# Altium PCB PCB1.PcbDoc (part 2 of 2)
Units mm, origin at the board's own origin, x right, y up, seen from the top; angles counter-clockwise.
Board outline 210 x 140 mm, 2 copper layers (Top Layer, Bottom Layer); 228 components, 149 nets, 688 pads, 245 vias.
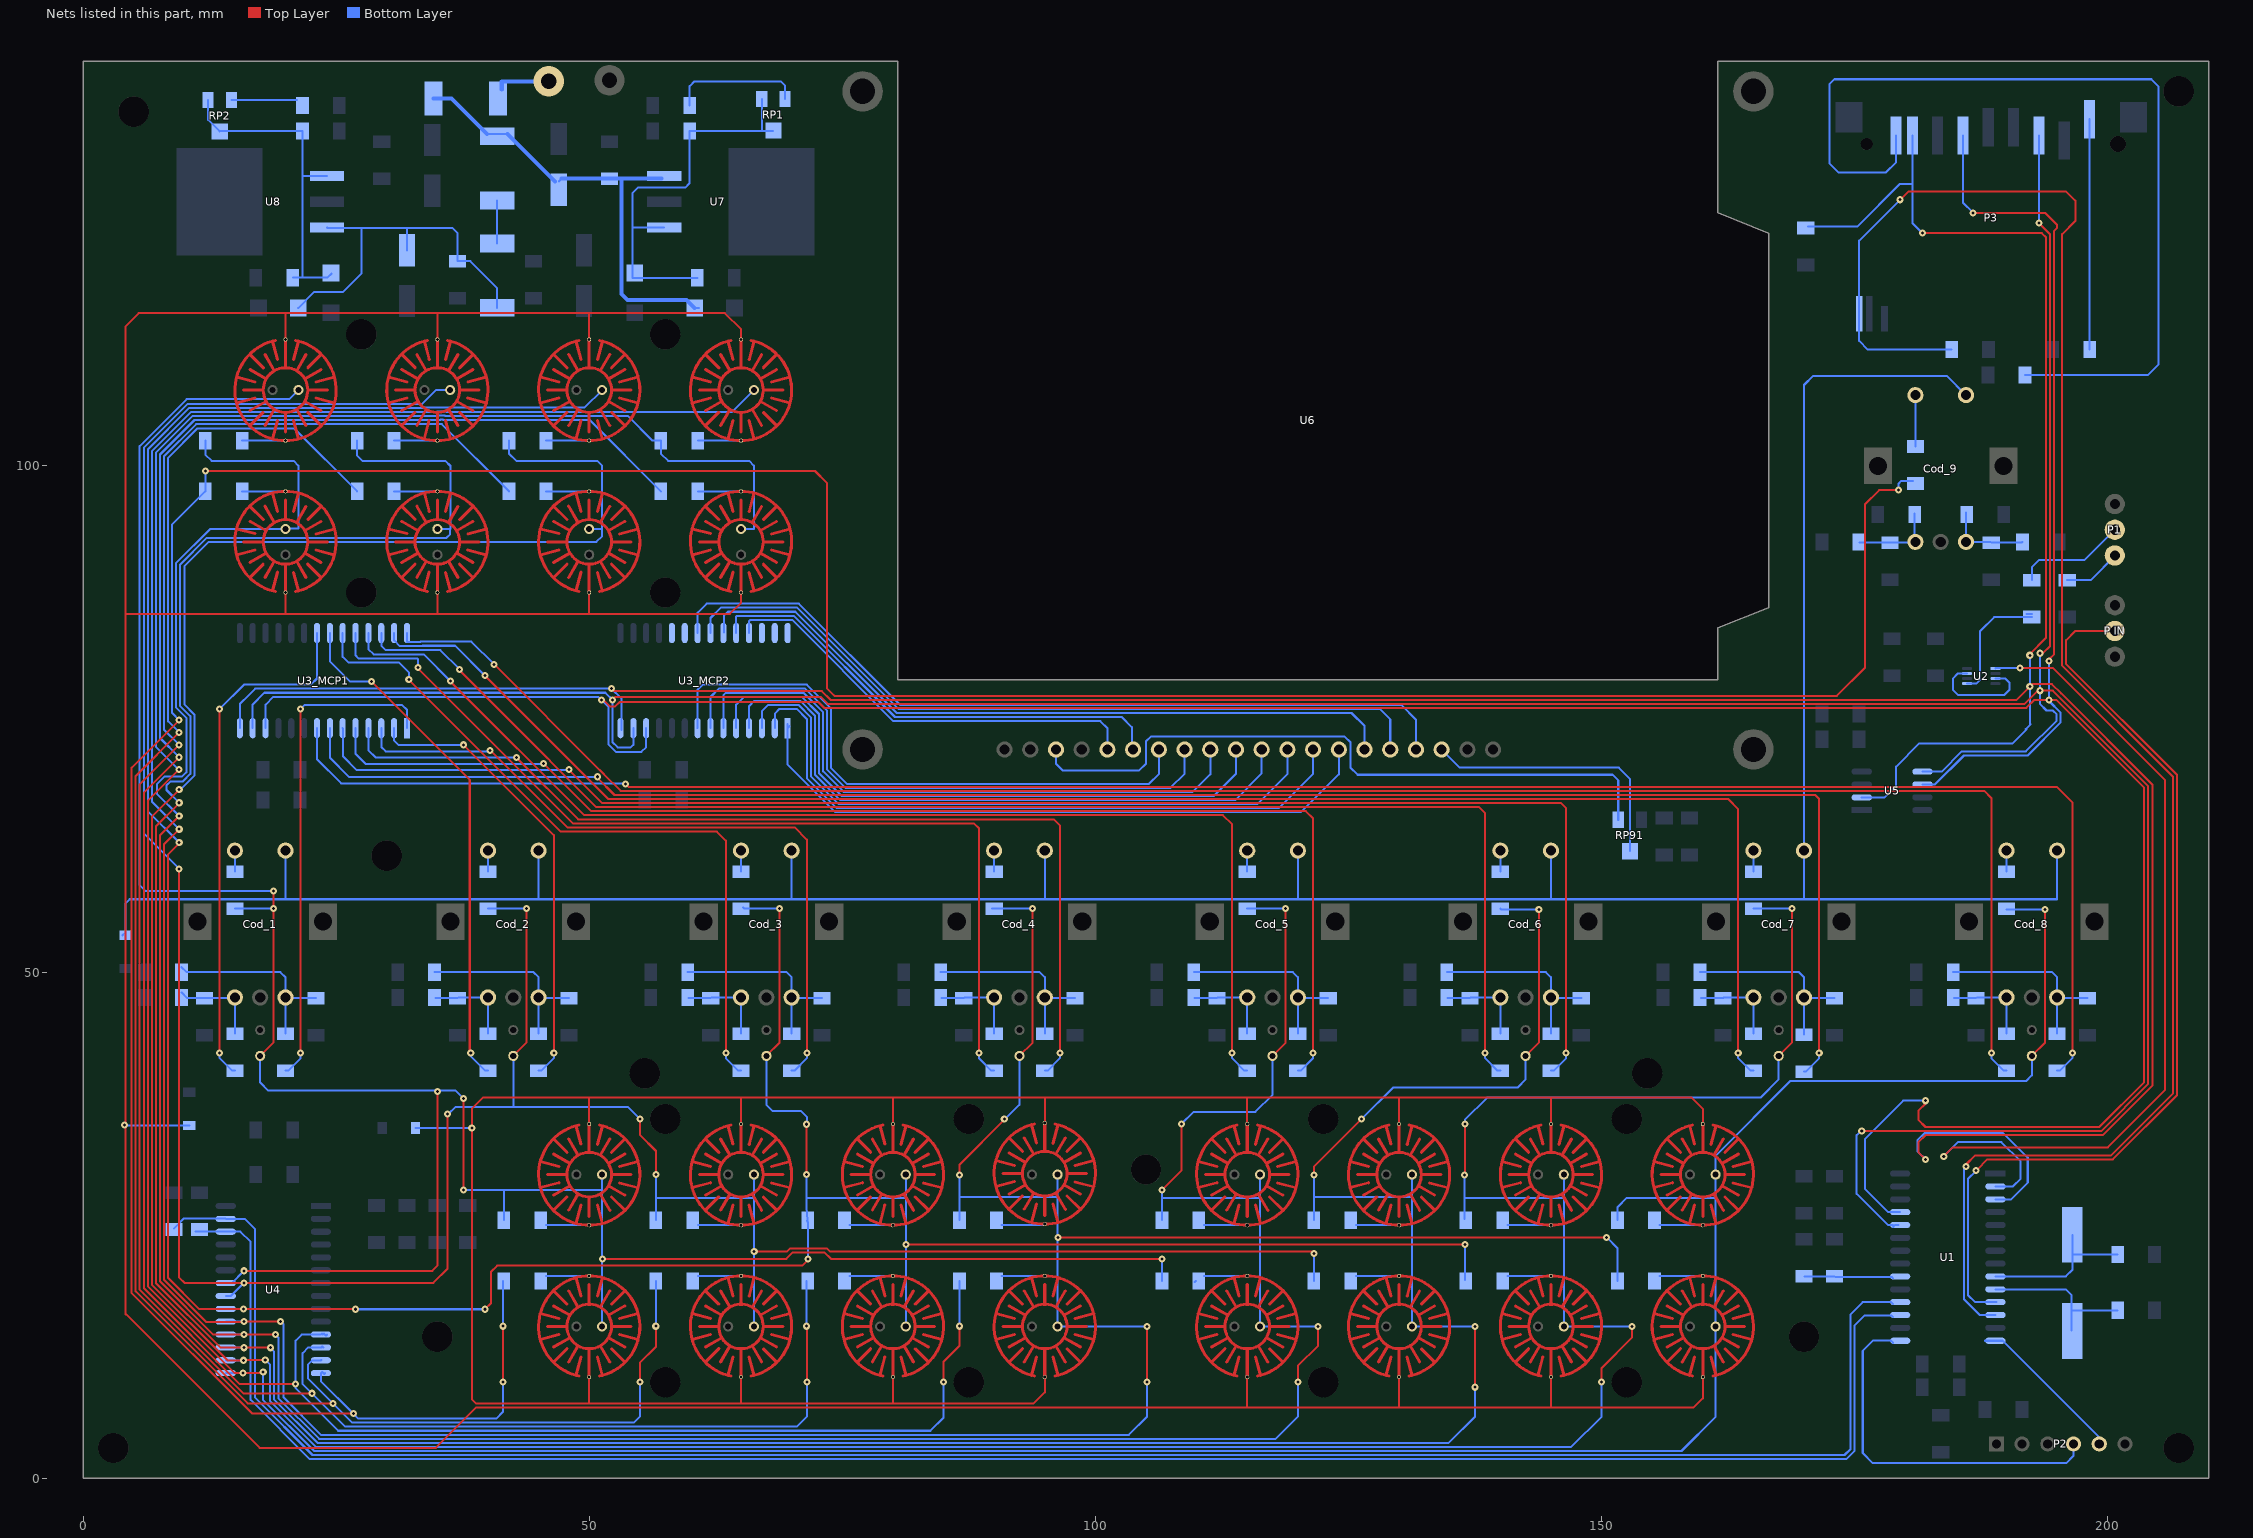
[diagram p2: the nets of this part, all layers, seen from the top]

## Via types
v1: diameter 0.7, hole 0.3, Top Layer to Bottom Layer, 245 vias

## Nets (pads, with @x,y where several pads share a name; then routed paths per layer and width w, separated by ;. In a path a pad name is that pad's centre, name@x,y a point inside that pad or via, vN(x,y) a via of type N, cw(c..) or ccw(c..) an arc to the next point about the centre after c; other vN are vias at no path point) (continued)
K1: D1_1.1 D1_2.1 D1_3.1 D1_4.1 R61.1 R501_1.1 R501_2.1 U4.22 | length 256.3
  Top Layer w0.2: v1(15.9,20.5) 34.5,20.5 35,21 v1(35,38.2) ; D1_4.1@17.5,41.73 18.8,43.03 v1(18.8,56.3) v1(18.8,58) ; v1(37.6,28.5) 37.5,28.6 37.6,28.7 v1(37.6,37.5) ; v1(51.3,21.675) 69.468,21.675 70.118,22.325 73.236,22.325 73.886,21.675 v1(106.575,21.675)
  Bottom Layer w0.2: U4.22@14.1,19.28 14.68,19.28 v1(15.9,20.5) ; R61.1@15,56.275 15.025,56.3 v1(18.8,56.3) ; D1_4.1@17.5,41.73 17.5,39.1 18.3,38.3 36.8,38.3 v1(37.6,37.5) ; v1(18.8,58) 6.2,58 5.6,58.6 5.6,101.96 10.24,106.6 20.37,106.6 D1_3.1@21.27,107.5 ; v1(37.6,28.5) 41.575,28.5 ; R501_1.1@41.575,25.5 41.575,28.5 ; D1_2.1@51.27,15 D1_1.1@51.27,30 ; 51.27,28.5 41.575,28.5 ; R501_2.1@106.575,19.5 v1(106.575,21.675)
K2: D2_1.1 D2_2.1 D2_3.1 D2_4.1 R62.1 R502_1.1 R502_2.1 U4.21 | length 299.4
  Top Layer w0.2: v1(9.5,60.2) 9.5,19.823 10.023,19.3 v1(15.9,19.3) 34.6,19.3 36,20.7 ; 36,20.7 v1(36,36) ; D2_4.1@42.5,41.73 43.8,43.03 v1(43.8,56.3) ; v1(55,35.5) 55,33.931 56.6,32.331 v1(56.6,30) ; v1(66.3,22.4) 69.514,22.4 69.839,22.725 73.477,22.725 73.802,22.4 121.4,22.4 v1(121.6,22.2)
  Bottom Layer w0.2: v1(9.5,60.2) 6,63.7 6,101.794 10.347,106.141 33.503,106.141 34.861,107.5 D2_3.1@36.27,107.5 ; U4.21@14.1,18.01 14.61,18.01 v1(15.9,19.3) ; v1(36,36) 36.1,36 36.8,36.7 53.8,36.7 v1(55,35.5) ; R62.1@40,56.275 40.025,56.3 v1(43.8,56.3) ; 42.5,36.7 D2_4.1@42.5,41.73 ; R502_1.1@56.575,25.5 56.575,26.775 56.6,26.8 ; v1(56.6,30) 56.6,26.8 ; D2_2.1@66.27,15 D2_1.1@66.27,30 ; 66.27,27.77 66.2,27.7 56.6,27.7 56.6,26.8 ; R502_2.1@121.575,19.5 121.6,19.525 v1(121.6,22.2)
K3: D3_1.1 D3_2.1 D3_3.1 D3_4.1 R63.1 R503_1.1 R503_2.1 U4.20 | length 326.8
  Top Layer w0.2: v1(9.502,62.813) 9.502,62.74 8.4,61.638 8.4,19.791 11.451,16.74 v1(15.86,16.74) v1@27.04,16.74 ; v1(39.7,16.7) 40.3,17.3 40.3,20.4 40.9,21 71.043,21 v1@71.6,21.557 ; D3_4.1@67.5,41.73 68.8,43.03 v1(68.8,56.3) ; v1(71.475,30) v1(71.475,34.975) ; v1(81.3,23.1) v1(136.5,23.1)
  Bottom Layer w0.2: v1@9.43,62.885 v1(9.502,62.813) 9.483,62.813 6.4,65.896 6.4,69.003 6.4,69.997 6.4,101.628 10.513,105.741 33.669,105.741 33.711,105.784 49.554,105.784 D3_3.1@51.27,107.5 ; U4.20@14.1,16.74 v1(15.86,16.74) ; v1(26.9,16.7) v1(39.7,16.7) ; R63.1@65.2,56.4 65.3,56.3 v1(68.8,56.3) ; D3_4.1@67.5,41.73 67.5,36.9 68.1,36.3 70.9,36.3 71.5,35.7 v1@71.5,35 ; v1(71.475,30) 71.475,26.775 R503_1.1@71.575,25.5 71.5,25.425 71.6,25.325 71.579,25.304 71.6,25.283 v1(71.6,21.675) ; 71.6,27.7 81.27,27.7 ; D3_2.1@81.27,15 D3_1.1@81.27,30 ; R503_2.1@136.5,19.575 v1(136.5,23.1)
K4: D4_1.1 D4_2.1 D4_3.1 D4_4.1 R64.1 R504_1.1 R504_2.1 U4.19 | length 395.2
  Top Layer w0.2: v1@9.499,64.119 8,62.62 8,19.626 12.185,15.44 15.84,15.44 v1(15.9,15.5) v1(19.5,15.5) ; v1(86.575,29.975) 86.575,30.975 91.1,35.5 v1(91,35.5) ; D4_4.1@92.5,41.73 93.8,43.03 v1(93.8,56.3) ; v1(96.3,23.8) v1(150.5,23.8) ; v1(105.1,9.5) v1(105.1,15)
  Bottom Layer w0.2: v1(9.502,64.119) 6.818,66.803 6.8,66.803 6.8,69.169 6.8,69.831 6.8,101.463 10.679,105.341 34.937,105.341 34.978,105.383 35.889,105.383 35.921,105.352 64.122,105.352 D4_3.1@66.27,107.5 ; U4.19@14.1,15.47 14.13,15.5 v1(15.9,15.5) ; v1(19.5,15.5) 19.8,15.2 19.8,7.994 23.494,4.3 103.3,4.3 105.1,6.1 v1(105.1,9.5) ; R504_1.1@86.575,25.5 86.575,27.8 ; v1(86.575,29.975) 86.575,27.8 ; R64.1@89.8,56.3 v1(93.8,56.3) ; v1(91,35.5) 91.1,35.5 92.5,36.9 D4_4.1@92.5,41.73 ; 96.27,27.8 86.575,27.8 ; D4_1.1@96.27,30 D4_2.1@96.27,15 v1(105.1,15) ; v1(150.5,23.8) 151.575,22.725 R504_2.1@151.575,19.5
K5: D5_1.1 D5_2.1 D5_3.1 D5_4.1 R65.1 R505_1.1 R505_2.1 U4.18 | length 314.3
  Top Layer w0.2: v1(9.502,65.425) 7.6,63.523 7.6,19.46 12.86,14.2 v1(15.9,14.2) v1(19,14.2) ; v1(106.6,28.5) 108.5,30.4 v1(108.5,35) ; D5_4.1@117.5,41.73 118.8,43.03 v1(118.8,56.3) ; v1(120,9.5) 120,11.1 122,13.1 v1(122,15)
  Bottom Layer w0.2: v1(9.502,65.425) 7.3,67.628 7.3,68.554 8.085,69.339 9.792,69.339 10.2,69.747 10.2,75.119 9.2,76.119 9.2,90.431 12.539,93.77 D5_3.1@20,93.77 ; R505_2.1@12.075,102.5 12.075,101.125 12.7,100.5 20.8,100.5 21.27,100.03 21.27,93.83 D5_3.1@20.06,93.83 ; U4.18@14.1,14.2 v1(15.9,14.2) ; v1(19,14.2) 19.3,13.9 19.3,7.928 23.328,3.9 101.666,3.9 117.8,3.9 120,6.1 v1(120,9.5) ; R505_1.1@106.575,25.5 106.6,25.525 v1(106.6,28.5) ; 106.6,27.7 116.27,27.7 ; v1(108.5,35) 109.7,36.2 115.8,36.2 117.5,37.9 D5_4.1@117.5,41.73 ; R65.1@115,56.275 115.025,56.3 v1(118.8,56.3) ; D5_1.1@116.27,30 D5_2.1@116.27,15 v1(122,15)
K6: D6_1.1 D6_2.1 D6_3.1 D6_4.1 R66.1 R506_1.1 R506_2.1 U4.17 | length 354.8
  Top Layer w0.2: v1(9.502,66.731) 9.502,66.686 7.2,64.384 7.2,19.294 13.594,12.9 v1(15.9,12.9) v1(18.5,12.9) ; v1(121.575,29.975) 121.575,30.775 v1(126.3,35.5) ; v1(137.5,9) v1(137.5,15) ; D6_4.1@142.5,41.73 143.8,43.03 v1(143.8,56.2)
  Bottom Layer w0.2: v1(9.502,66.731) 8.243,67.99 8.243,68.443 8.655,68.855 9.874,68.855 10.6,69.581 10.6,75.285 9.6,76.285 9.6,90.266 12.234,92.9 35.9,92.9 36.27,93.27 36.27,93.77 ; U4.17@14.1,12.93 v1@15.87,12.93 ; v1(18.5,12.9) 18.85,12.55 18.85,7.813 23.163,3.5 103.112,3.5 134.9,3.5 137.5,6.1 v1(137.5,9) ; R506_2.1@27.075,102.5 27.075,101.025 27.6,100.5 35.8,100.5 36.3,100 36.3,93.8 36.27,93.77 ; D6_3.1@35,93.77 36.27,93.77 ; R506_1.1@121.575,25.5 121.575,27.8 ; v1(121.575,29.975) 121.575,27.8 ; v1(126.3,35.5) 129.4,38.6 141.7,38.6 142.5,39.4 D6_4.1@142.5,41.73 ; 131.27,27.8 121.575,27.8 ; D6_1.1@131.27,30 D6_2.1@131.27,15 v1(137.5,15) ; R66.1@140,56.275 140.075,56.2 v1(143.8,56.2)
K7: D7_1.1 D7_2.1 D7_3.1 D7_4.1 R67.1 R507_1.1 R507_2.1 U4.16 | length 395.2
  Top Layer w0.2: v1(9.502,68.038) 6.8,65.335 6.8,19.128 14.268,11.66 v1(15.84,11.66) 15.9,11.6 16,11.7 v1(18,11.7) ; v1@136.5,30 v1(136.5,35) ; v1(150,9.5) 150,10.9 153,13.9 v1(153,15) ; D7_4.1@167.5,41.73 168.8,43.03 v1(168.8,56.3)
  Bottom Layer w0.2: v1(9.502,68.038) 9.622,68.038 11,69.415 11,75.451 10,76.451 10,90.1 12.4,92.5 50.7,92.5 51.27,93.07 51.27,100.03 50.8,100.5 42.8,100.5 42.075,101.225 R507_2.1@42.075,102.5 ; U4.16@14.1,11.66 v1(15.84,11.66) ; v1(18,11.7) 18.45,11.25 18.45,7.647 22.997,3.1 102.946,3.1 147,3.1 150,6.1 v1(150,9.5) ; D7_3.1@50,93.77 51.21,93.77 ; R507_1.1@136.475,25.6 136.475,27.7 ; v1(136.475,29.975) 136.475,27.7 ; v1(136.5,35) 136.5,35.4 138.7,37.6 165.7,37.6 167.5,39.4 D7_4.1@167.5,41.73 ; 146.27,27.7 136.475,27.7 ; D7_1.1@146.27,30 D7_2.1@146.27,15 v1(153,15) ; R67.1@165,56.275 165.025,56.3 v1(168.8,56.3)
K8: D8_1.1 D8_2.1 D8_3.1 D8_4.1 R68.1 R508_1.1 R508_2.1 U4.15 | length 414.1
  Top Layer w0.2: v1(9.462,70.006) 6.4,66.943 6.4,66.235 6.4,18.963 14.973,10.39 v1(15.79,10.39) v1@17.49,10.39 ; D8_4.1@192.5,41.73 193.8,43.03 v1(193.8,56.2)
  Bottom Layer w0.2: v1(9.462,70.006) 7.2,72.268 7.2,101.297 10.844,104.941 35.102,104.941 35.144,104.983 35.724,104.983 35.755,104.952 53.8,104.952 56.251,102.5 R508_2.1@57.075,102.5 57.075,101.225 57.8,100.5 65.8,100.5 66.27,100.03 66.27,93.8 66.24,93.77 D8_3.1@65,93.77 ; U4.15@14.1,10.39 v1(15.79,10.39) ; v1(17.8,10.5) 17.8,7.731 22.831,2.7 102.781,2.7 157.9,2.7 161.27,6.07 D8_2.1@161.27,15 D8_1.1@161.27,30 ; R508_1.1@151.575,25.5 151.575,26.775 152.5,27.7 161.17,27.7 161.27,27.8 ; D8_1.1@161.4,30.13 D8_1.1@161.27,30 ; R68.1@190.025,56.2 v1(193.8,56.2) ; D8_4.1@192.5,41.73 192.5,39.8 191.95,39.25 168.65,39.25 161.27,31.87 D8_1.1@161.27,30
K9: R69.1 R509_1.1 R509_2.1 U4.14 | length 354.2
  Top Layer w0.2: v1(9.5,74.9) 4.8,70.2 4.8,18.3 16.7,6.4 v1(26.7,6.4) ; v1(12.1,99.5) 72.3,99.5 73.471,98.329 73.471,78.059 74.215,77.315 ; v1(41.475,15.025) 41.5,14.95 v1(41.5,9.5) ; 74.215,77.3 173.249,77.3 176.026,80.077 176.026,96.226 177.419,97.619 v1(179.33,97.619)
  Bottom Layer w0.2: v1(9.5,74.9) 8.8,75.6 8.8,94.225 R509_2.1@12.075,97.5 12.1,97.525 v1(12.1,99.5) ; U4.14@23.91,10.4 23.81,10.3 23.61,10.5 U4.14@23.5,10.39 23.5,9.6 v1(26.7,6.4) 27.2,5.9 40.8,5.9 41.5,6.6 v1(41.5,9.5) ; R509_1.1@41.475,19.5 v1(41.475,15.025) v1@41.6,15 ; v1(179.33,97.619) 179.33,98.256 179.572,98.498 R69.1@180.777,98.498
K10: R510_1.1 R510_2.1 U4.13 | length 182.9
  Top Layer w0.2: v1(9.5,73.676) 5.2,69.376 5.2,18.466 16.266,7.4 v1(24.7,7.4) ; v1(55,9.5) 55,11.4 56.575,12.975 v1(56.575,15.025)
  Bottom Layer w0.2: v1(9.5,73.676) 8.4,74.776 8.4,100.8 11.3,103.7 20.875,103.7 R510_2.1@27.075,97.5 ; U4.13@23.54,11.7 U4.13@23.5,11.66 22.66,11.66 22.2,11.2 22.2,9.9 26.6,5.5 54.4,5.5 55,6.1 v1(55,9.5) ; v1(56.575,15.025) R510_1.1@56.575,19.5
K11: R511_1.1 R511_2.1 U4.12 | length 214.7
  Top Layer w0.2: v1(9.5,72.453) 5.6,68.553 5.6,18.631 15.831,8.4 v1(22.6,8.4) ; v1(71.475,15.025) 71.5,14.95 v1(71.5,9.5)
  Bottom Layer w0.2: v1(9.5,72.453) 8,73.953 8,100.966 11.176,104.141 35.434,104.141 R511_2.1@42.075,97.5 ; U4.12@23.73,12.9 23.63,13 23.53,12.9 U4.12@23.5,12.93 22.264,12.93 21.7,12.366 21.7,9.3 25.9,5.1 70.5,5.1 71.5,6.1 v1(71.5,9.5) ; v1(71.475,15.025) R511_1.1@71.475,19.5
K12: R512_1.1 R512_2.1 U4.11 | length 246.1
  Top Layer w0.2: v1(9.5,71.229) 6,67.729 6,18.797 15.497,9.3 v1(21,9.3) ; v1(85,9.5) 85,11.5 86.575,13.075 v1(86.575,15.025)
  Bottom Layer w0.2: v1(9.5,71.229) 7.6,73.129 7.6,101.131 11.01,104.541 35.268,104.541 35.309,104.583 35.558,104.583 35.599,104.541 50.034,104.541 R512_2.1@57.075,97.5 ; U4.11@24.1,14.2 24,14.1 23.8,14.3 23.7,14.2 23.6,14.3 U4.11@23.5,14.2 21.6,14.2 21,13.6 21,8.9 25.2,4.7 83.7,4.7 85,6 v1(85,9.5) ; v1(86.575,15.025) R512_1.1@86.575,19.5
MISO: P3.7 R44.1 U1.3 U3_MCP1.14 U3_MCP2.14 U5.2 | length 383.9
  Top Layer w0.2: v1(52.2,78) 52.45,77.75 72.986,77.75 73.836,76.9 191,76.9 v1(192.3,78.2) 192.55,78.45 194.484,78.45 195.4,77.534 204.4,68.534 204.4,38.794 199.506,33.9 182,33.9 181.3,33.2 181.3,32.2 v1(182,31.5) ; v1(181.7,123) 193.5,123 193.9,122.6 193.9,83.019 192.3,81.419 v1(192.3,81.3) v1@192.3,81.5
  Bottom Layer w0.2: U3_MCP1.14@15.49,74.1 15.49,76.49 16.4,77.4 17,78 18.41,78 19.49,78 v1(52.2,78) 53.2,77 U3_MCP2.14@53.2,73.9 ; R44.1@170.373,123.635 175.25,123.635 179.479,127.864 180.558,127.864 ; U5.2@175.7,67.27 177.97,67.27 179.1,68.4 179.1,70.3 181.4,72.6 190.6,72.6 191.95,73.95 ; P3.7@180.7,132.65 180.7,124 v1(181.7,123) ; v1@181.9,31.5 v1(182,31.5) 181.2,32.3 181.2,33.4 181.9,34.1 189.666,34.1 192.1,31.666 192.1,29.2 190.46,27.56 U1.3@188.9,27.56 ; 191.9,74 192.381,74.482 192.3,74.562 v1(192.3,78.2) v1(192.3,81.3)
MOSI: P3.2 U1.24 U3_MCP1.13 U3_MCP2.13 U5.5 | length 350.2
  Top Layer w0.2: v1(52.3,76.9) 52.585,77.185 72.867,77.185 73.551,76.5 191.8,76.5 193.1,77.8 194.569,77.8 194.959,77.41 204,68.369 204,38.96 199.34,34.3 178.649,34.3 v1(175.7,34.3) ; v1(193.2,124) 194.3,122.9 194.3,82.2 193.6,81.5 v1(193.3,81.5)
  Bottom Layer w0.2: U3_MCP1.13@16.76,74.1 16.76,76.44 17.92,77.6 18.576,77.6 19.324,77.6 51.6,77.6 v1(52.3,76.9) 52.3,72.7 52.8,72.2 54.1,72.2 54.36,72.46 U3_MCP2.13@54.36,74.1 ; v1(175.7,34.3) 175.6,34.3 175.2,33.9 175.2,28.1 178.3,25 U1.24@178.8,25 ; U1.24@178.8,24.82 178.98,25 U1.24@179.351,25 ; U5.5@181.7,69.81 183.61,69.81 185.6,71.8 191.919,71.8 194.95,74.831 194.95,75.466 194.569,75.847 193.953,75.847 193.3,76.5 v1(193.3,77.8) ; v1(193.2,124) P3.2@193.2,132.65 ; v1(193.3,81.5) 193.3,78 v1@193.4,77.9
NetC1_1: C1.1 C2.2 D1.2 D2.2 D4.1 U7.3 | length 45.2
  Bottom Layer w0.2: D4.1@39.92,132.78 D4.1@41.92,132.78 ; C1.1@47,128.1 C1.1@47.275,128.375 ; D2.2@60.4,115.6 D2.2@60.84,115.6
  Bottom Layer w0.4: D1.2@34.62,136.3 36.4,136.3 D4.1@39.92,132.78 ; D4.1@41.92,132.78 C1.1@46.6,128.1 ; C1.1@47.275,128.375 C2.2@52,128.375 53.2,128.375 ; U7.3@57.135,128.375 53.2,128.375 ; D2.2@60.4,115.6 59.6,116.4 53.8,116.4 53.2,117 53.2,128.375
NetC3_2: C3.2 D3.1 R2.2 RP1.1 RP1.3 U7.1 | length 40.4
  Bottom Layer w0.2: 54.3,123.56 U7.1@57.4,123.56 ; C3.2@59.9,133.075 59.9,127.9 59.5,127.5 54.8,127.5 54.26,126.96 54.26,118.56 R2.2@60.675,118.56 ; C3.2@59.925,133.1 RP1.3@68.15,133.1 ; 67.05,133.15 RP1.1@67.05,136.25
NetC6_1: C6.1 C7.2 D5.2 D6.2 U8.3 | length 37.2
  Bottom Layer w0.2: D6.2@21.26,115.6 22.86,117.2 25.7,117.2 27.5,119 27.5,123.5 ; U8.3@24.1,123.56 24.16,123.5 27.5,123.5 ; C6.1@32,121.3 32,123.5 ; D5.2@40.9,115.62 40.9,117.574 38.249,120.225 C7.2@37,120.225 37,123 36.5,123.5 27.5,123.5
NetC8_2: C8.2 D7.1 R4.2 RP2.1 RP2.3 U8.1 | length 32.7
  Bottom Layer w0.2: RP2.1@12.35,136.15 12.35,134.2 RP2.3@13.5,133.05 13.55,133.1 C8.2@21.675,133.1 21.675,118.625 ; R4.2@20.725,118.6 24.14,118.6 D7.1@24.55,119.01 ; 21.675,128.7 21.735,128.64 U8.1@24.1,128.64
NetC71_1_2: C71_1.2 Cod_1.A R71_1.1 R73_1.1 | length 9.1
  Bottom Layer w0.2: R71_1.1@9.725,48 10.3,47.425 C71_1.2@12,47.425 14.925,47.425 Cod_1.A@15,47.5 R73_1.1@15,43.925
NetC71_2_2: C71_2.2 Cod_2.A R71_2.1 R73_2.1 | length 8.7
  Bottom Layer w0.2: R71_2.1@34.8,47.425 C71_2.2@37,47.425 ; C71_2.2@37.075,47.5 Cod_2.A@40,47.5 R73_2.1@40,43.925
NetC71_3_2: C71_3.2 Cod_3.A R71_3.1 R73_3.1 | length 8.7
  Bottom Layer w0.2: R71_3.1@59.8,47.425 C71_3.2@62,47.425 ; C71_3.2@62.075,47.5 Cod_3.A@65,47.5 R73_3.1@65,43.925
NetC71_4_2: C71_4.2 Cod_4.A R71_4.1 R73_4.1 | length 8.7
  Bottom Layer w0.2: R71_4.1@84.8,47.425 C71_4.2@87,47.425 ; C71_4.2@87.075,47.5 Cod_4.A@90,47.5 R73_4.1@90,43.925
NetC71_5_2: C71_5.2 Cod_5.A R71_5.1 R73_5.1 | length 8.7
  Bottom Layer w0.2: R71_5.1@109.8,47.425 C71_5.2@112,47.425 ; C71_5.2@112.075,47.5 Cod_5.A@115,47.5 R73_5.1@115,43.925
NetC71_6_2: C71_6.2 Cod_6.A R71_6.1 R73_6.1 | length 8.7
  Bottom Layer w0.2: R71_6.1@134.8,47.425 C71_6.2@137,47.425 ; C71_6.2@137.075,47.5 Cod_6.A@140,47.5 R73_6.1@140,43.925
NetC71_7_2: C71_7.2 Cod_7.A R71_7.1 R73_7.1 | length 8.8
  Bottom Layer w0.2: R71_7.1@159.8,47.425 C71_7.2@162,47.425 162.075,47.5 Cod_7.A@165,47.5 R73_7.1@165,43.925
NetC71_8_2: C71_8.2 Cod_8.A R71_8.1 R73_8.1 | length 8.7
  Bottom Layer w0.2: R71_8.1@184.8,47.425 C71_8.2@187,47.425 ; C71_8.2@187.075,47.5 Cod_8.A@190,47.5 R73_8.1@190,43.925
NetC71_9_2: C71_9.2 Cod_9.A R71_9.1 R73_9.1 | length 8.3
  Bottom Layer w0.2: R71_9.1@175.5,92.425 C71_9.2@178.5,92.425 Cod_9.A@180.925,92.425 ; Cod_9.A@180.925,92.375 R73_9.1@180.925,95.3
NetC72_1_1: C72_1.1 Cod_1.B R72_1.1 R74_1.1 | length 19.3
  Bottom Layer w0.2: R72_1.1@9.725,50.5 10.225,50 19.5,50 20,49.5 Cod_1.B@20,47.5 ; R74_1.1@20,43.925 Cod_1.B@20,47.5 ; C72_1.1@23,47.425 20.075,47.425 Cod_1.B@20,47.5
NetC72_2_1: C72_2.1 Cod_2.B R72_2.1 R74_2.1 | length 19.1
  Bottom Layer w0.2: R72_2.1@34.725,50 44.5,50 45,49.5 Cod_2.B@45,47.5 ; R74_2.1@45,43.925 Cod_2.B@45,47.5 ; C72_2.1@48,47.425 45.075,47.425 Cod_2.B@45,47.5
NetC72_3_1: C72_3.1 Cod_3.B R72_3.1 R74_3.1 | length 19
  Bottom Layer w0.2: R72_3.1@59.725,50 69.5,50 70,49.5 Cod_3.B@70,47.5 R74_3.1@70,43.925 ; Cod_3.B@70.075,47.425 C72_3.1@73,47.425
NetC72_4_1: C72_4.1 Cod_4.B R72_4.1 R74_4.1 | length 19
  Bottom Layer w0.2: R72_4.1@84.725,50 94.5,50 95,49.5 Cod_4.B@95,47.5 R74_4.1@95,43.925 ; Cod_4.B@95.075,47.425 C72_4.1@98,47.425
NetC72_5_1: C72_5.1 Cod_5.B R72_5.1 R74_5.1 | length 19
  Bottom Layer w0.2: R72_5.1@109.725,50 119.5,50 120,49.5 Cod_5.B@120,47.5 R74_5.1@120,43.925 ; Cod_5.B@120.075,47.425 C72_5.1@123,47.425
NetC72_6_1: C72_6.1 Cod_6.B R72_6.1 R74_6.1 | length 19
  Bottom Layer w0.2: R72_6.1@134.725,50 144.5,50 145,49.5 Cod_6.B@145,47.5 R74_6.1@145,43.925 ; Cod_6.B@145.075,47.425 C72_6.1@148,47.425
NetC72_7_1: C72_7.1 Cod_7.B R72_7.1 R74_7.1 | length 19.1
  Bottom Layer w0.2: R72_7.1@159.725,50 169.5,50 170,49.5 Cod_7.B@170,47.5 R74_7.1@170,43.825 ; Cod_7.B@170.075,47.425 C72_7.1@173,47.425
NetC72_8_1: C72_8.1 Cod_8.B R72_8.1 R74_8.1 | length 19.1
  Bottom Layer w0.2: R72_8.1@184.725,50 194.5,50 195,49.5 Cod_8.B@195,47.5 ; R74_8.1@195,43.925 Cod_8.B@195,47.5 ; C72_8.1@198,47.425 195.075,47.425 Cod_8.B@195,47.5
NetC72_9_1: C72_9.1 Cod_9.B R72_9.1 R74_9.1 | length 8.5
  Bottom Layer w0.2: R74_9.1@186,95.425 Cod_9.B@186,92.5 C72_9.1@188.425,92.5 ; C72_9.1@188.5,92.425 191.5,92.425 R72_9.1@191.575,92.5
NetC107_1: C107.1 C108.1 U1.20 | length 8.7
  Bottom Layer w0.2: C107.1@170.05,19.95 C108.1@173,19.95 ; C108.1@173.1,19.875 178.665,19.875 U1.20@178.8,19.74
NetCod_1_1: Cod_1.1 R61.2 | length 2.1
  Bottom Layer w0.2: R61.2@15,59.925 Cod_1.1@15,62
NetCod_1_2: Cod_1.2 Cod_2.2 Cod_3.2 Cod_4.2 Cod_5.2 Cod_6.2 Cod_7.2 Cod_8.2 Cod_9.2 D61.2 | length 295.8
  Bottom Layer w0.2: D61.2@3.9,53.635 4.2,53.935 4.2,56.8 4.6,57.2 70,57.2 ; 20,57.2 Cod_1.2@20,62 ; 45,57.2 Cod_2.2@45,62 ; Cod_3.2@70,62 70,57.2 ; 95,57.2 Cod_4.2@95,62 ; Cod_5.2@120,62 120,57.2 ; Cod_6.2@145,62 145,57.2 ; Cod_9.2@186,107 184.1,108.9 170.9,108.9 170,108 170,57.2 ; Cod_8.2@195,62 195,57.2 170,57.2 ; 70,57.2 120,57.2 ; 120,57.2 145,57.2 ; 145,57.2 170,57.2
NetCod_2_1: Cod_2.1 R62.2 | length 2.1
  Bottom Layer w0.2: R62.2@40,59.925 Cod_2.1@40,62
NetCod_3_1: Cod_3.1 R63.2 | length 2.1
  Bottom Layer w0.2: R63.2@65,59.925 Cod_3.1@65,62
NetCod_4_1: Cod_4.1 R64.2 | length 2.1
  Bottom Layer w0.2: R64.2@90,59.925 Cod_4.1@90,62
NetCod_5_1: Cod_5.1 R65.2 | length 2.1
  Bottom Layer w0.2: R65.2@115,59.925 Cod_5.1@115,62
NetCod_6_1: Cod_6.1 R66.2 | length 2.1
  Bottom Layer w0.2: R66.2@140,59.925 Cod_6.1@140,62
NetCod_7_1: Cod_7.1 R67.2 | length 2.1
  Bottom Layer w0.2: R67.2@165,59.925 Cod_7.1@165,62
NetCod_8_1: Cod_8.1 R68.2 | length 2.1
  Bottom Layer w0.2: R68.2@190,59.925 Cod_8.1@190,62
NetCod_9_1: Cod_9.1 R69.2 | length 5.1
  Bottom Layer w0.2: R69.2@181,101.925 Cod_9.1@181,107
NetD1_1: D1.1 P0.1 | length 5.4
  Bottom Layer w0.4: D1.1@41.36,137.2 41.36,137.96 41.4,138 P0.1@46,138
NetD4_2: D4.2 D5.1 | length 4.2
  Bottom Layer w0.2: D5.1@40.9,121.98 D4.2@40.9,126.22
NetD51_1_2: D51_1.2 S1_1.1 S2_1.1 S3_1.1 S4_1.1 S5_1.1 S6_1.1 S7_1.1 S8_1.1 S9_1.1 S10_1.1 S11_1.1 S12_1.1 | length 243
  Top Layer w0.2: S9_1.1@50,10 50,9.2 50,7.4 ; S1_1.1@50,35 50,37.6 ; 65,7.4 S10_1.1@65,10 ; S2_1.1@65,35 65,37.6 ; 80,7.4 S11_1.1@80,10 ; S3_1.1@80,35 80,37.6 ; S12_1.1@95,10 95,8.5 93.9,7.4 50,7.4 ; S4_1.1@95,35 95,37.6 ; S5_1.1@115,35 115,37.6 ; S6_1.1@130,35 130,37.6 ; S7_1.1@145,35 145,37.6 ; S8_1.1@160,35 160,36.5 158.9,37.6 130,37.6 ; 50,7.4 38.8,7.4 38.4,7.8 38.4,36.5 39.5,37.6 50,37.6 ; 50,37.6 80,37.6 ; 80,37.6 95,37.6 ; 95,37.6 130,37.6
  Bottom Layer w0.2: D51_1.2@32.835,34.6 v1(38.4,34.6)
NetD51_2_2: D51_2.2 S1_2.1 S2_2.1 S3_2.1 S4_2.1 S5_2.1 S6_2.1 S7_2.1 S8_2.1 S9_2.1 S10_2.1 S11_2.1 S12_2.1 | length 418
  Top Layer w0.2: 20,85.4 S9_2.1@20,87.5 ; S5_2.1@20,112.5 20,115.1 ; 35,85.4 S10_2.1@35,87.5 ; S6_2.1@35,112.5 35,115.1 ; 38.8,7 130,7 ; 38.812,6.988 34.842,3.018 17.436,3.018 4.254,16.2 4.2,16.2 4.2,85.4 ; 50,85.4 S11_2.1@50,87.5 ; S7_2.1@50,112.5 50,115.1 ; S12_2.1@65,87.5 65,86.5 63.9,85.4 4.2,85.4 ; S8_2.1@65,112.5 65,113.5 63.4,115.1 35,115.1 ; 115,7.1 S1_2.1@115,10 ; S2_2.1@130,10 130,7 ; S3_2.1@145,10 145,7 ; S4_2.1@160,10 160,7.9 159.1,7 145,7 ; 4.2,85.4 4.2,113.8 5.5,115.1 20,115.1 ; 20,115.1 35,115.1 ; 130,7 145,7
  Bottom Layer w0.2: v1(4.1,34.9) 3.97,34.9 3.935,34.865 D51_2.2@10.5,34.865
NetP1_1: P1.1 R102.1 | length 5.9
  Bottom Layer w0.2: R102.1@196,88.725 198.325,88.725 200.76,91.16 P1.1@200.9,91.16
NetP1_2: P1.2 R101.1 | length 11.2
  Bottom Layer w0.2: R101.1@192.5,88.725 192.5,90 193.2,90.7 197.7,90.7 P1.2@200.7,93.7 P1.2@200.9,93.7
NetP3_8: P3.8 R43.1 | length 91.9
  Bottom Layer w0.2: P3.8@179.1,132.65 179.1,130 178.1,129 173.4,129 172.5,129.9 172.5,137.7 173,138.2 204.3,138.2 205,137.5 205,110 204,109 R43.1@191.825,109
NetP3_9: P3.9 R42.1 | length 22.7
  Bottom Layer w0.2: R42.1@198.2,111.525 P3.9@198.2,134.25
"NetP IN_2": "P IN.2" U1.11 | length 93.5
  Top Layer w0.2: v1(187,30.4) 187.2,30.4 187.1,30.5 188.1,31.5 200.5,31.5 206.841,37.841 206.841,69.493 195.9,80.434 195.9,82.8 196.8,83.7 200.7,83.7
  Bottom Layer w0.2: v1(187,30.4) 186.2,29.6 186.2,18.1 186.9,17.4 U1.11@189,17.4
NetR1_2: R1.2 RP1.2 | length 13
  Bottom Layer w0.2: R1.2@59.925,135.6 59.925,137.525 60.4,138 68.9,138 69.35,137.55 RP1.2@69.35,136.25
NetR3_1: R3.1 RP2.2 | length 6.5
  Bottom Layer w0.2: RP2.2@14.65,136.15 R3.1@21.125,136.15
NetR73_1_2: R73_1.2 U3_MCP1.21 | length 51.9
  Top Layer w0.2: v1(13.5,42) v1@13.5,76
  Bottom Layer w0.2: v1(13.5,42) 13.5,41.5 14.725,40.275 R73_1.2@15,40.275 ; v1(13.5,76) 15.9,78.4 18.244,78.4 19.297,78.4 19.656,78.4 22.5,78.4 23.11,79.01 U3_MCP1.21@23.11,83.5
NetR73_2_2: R73_2.2 U3_MCP1.22 | length 51.1
  Top Layer w0.2: v1(28.5,78.7) 38.2,69 38.2,42.1 v1(38.3,42)
  Bottom Layer w0.2: U3_MCP1.22@24.38,83.5 24.38,80.72 26.4,78.7 v1(28.5,78.7) ; v1(38.3,42) 38.3,41.7 39.725,40.275 R73_2.2@40,40.275
NetR73_3_2: R73_3.2 U3_MCP1.23 | length 71.6
  Top Layer w0.2: v1(32.178,78.9) 47.198,63.88 62.599,63.88 63.5,62.979 v1(63.5,42)
  Bottom Layer w0.2: U3_MCP1.23@25.65,83.5 25.65,81.15 26.2,80.6 31.2,80.6 32.178,79.622 v1(32.178,78.9) ; v1(63.5,42) 63.5,41.5 64.725,40.275 R73_3.2@65,40.275
NetR73_4_2: R73_4.2 U3_MCP1.24 | length 96.1
  Top Layer w0.2: v1(33.1,80.1) 33.1,79.981 48.381,64.7 88,64.7 88.5,64.2 v1(88.5,42)
  Bottom Layer w0.2: U3_MCP1.24@26.92,83.5 26.92,81.28 27.2,81 33,81 33.1,80.9 v1(33.1,80.1) ; v1(88.5,42) 88.5,41.5 89.725,40.275 R73_4.2@90,40.275
NetR73_5_2: R73_5.2 U3_MCP1.25 | length 119.2
  Top Layer w0.2: v1@36.4,78.6 49.5,65.5 112.6,65.5 113.5,64.6 v1(113.5,42)
  Bottom Layer w0.2: U3_MCP1.25@28.19,83.5 28.19,81.91 28.7,81.4 32.651,81.4 33.65,81.4 v1(36.3,78.75) v1@36.3,78.9 ; v1(113.5,42) 113.5,41.5 114.725,40.275 R73_5.2@115,40.275
NetR73_6_2: R73_6.2 U3_MCP1.26 | length 143.4
  Top Layer w0.2: v1(37.2,79.9) 37.2,79.8 45.75,71.25 45.769,71.25 46.15,70.869 46.15,70.85 50.7,66.3 137.467,66.3 137.9,66.3 138.5,65.7 v1(138.5,42)
  Bottom Layer w0.2: U3_MCP1.26@29.46,83.5 29.46,82.24 29.9,81.8 32.486,81.8 35.3,81.8 v1(37.2,79.9) ; v1(138.5,42) 138.5,41.5 139.725,40.275 R73_6.2@140,40.275
NetR73_7_2: R73_7.2 U3_MCP1.27 | length 167
  Top Layer w0.2: v1(39.7,79.3) 51.9,67.1 137.135,67.1 162.5,67.1 163.5,66.1 v1(163.5,42)
  Bottom Layer w0.2: U3_MCP1.27@30.73,83.5 30.73,82.77 31.3,82.2 33.469,82.2 33.51,82.241 36.759,82.241 v1(39.7,79.3) ; v1(163.5,42) 163.5,41.5 164.725,40.275 R73_7.2@165,40.275
NetR73_8_2: R73_8.2 U3_MCP1.28 | length 191.5
  Top Layer w0.2: v1(40.6,80.4) 51.05,69.95 51.069,69.95 51.45,69.569 51.45,69.55 53.1,67.9 136.804,67.9 187.8,67.9 188.5,67.2 v1(188.5,42)
  Bottom Layer w0.2: U3_MCP1.28@32,83.5 32,82.6 33.303,82.6 33.344,82.641 38.359,82.641 v1(40.6,80.4) ; v1(188.5,42) 188.5,41.5 189.725,40.275 R73_8.2@190,40.275
NetR74_1_2: R74_1.2 U3_MCP1.1 | length 49.2
  Top Layer w0.2: v1(21.5,42) v1(21.5,76)
  Bottom Layer w0.2: R74_1.2@20,40.275 20.275,40.275 21.5,41.5 v1(21.5,42) ; v1(21.5,76) 21.9,76.4 31.5,76.4 32,75.9 U3_MCP1.1@32,74.1
NetR74_2_2: R74_2.2 U3_MCP1.2 | length 44.9
  Top Layer w0.2: v1(37.564,72.459) 46.5,63.524 v1(46.5,42)
  Bottom Layer w0.2: U3_MCP1.2@30.73,74.1 30.73,72.87 31.147,72.453 31.153,72.459 v1(37.564,72.459) ; R74_2.2@45.025,40.3 R74_2.2@45,40.275 45.275,40.275 46.5,41.5 v1(46.5,42)
NetR74_3_2: R74_3.2 U3_MCP1.3 | length 71.4
  Top Layer w0.2: v1(40.181,71.907) 40.239,71.907 47.846,64.3 70.284,64.3 71.5,63.084 v1(71.5,42)
  Bottom Layer w0.2: U3_MCP1.3@29.46,74.1 29.46,72.24 29.9,71.8 40.074,71.8 v1(40.181,71.907) ; R74_3.2@70,40.275 70.275,40.275 71.5,41.5 v1(71.5,42)
NetR74_4_2: R74_4.2 U3_MCP1.4 | length 98.6
  Top Layer w0.2: v1(42.8,71.2) 48.9,65.1 95.9,65.1 96.5,64.5 v1(96.5,42)
  Bottom Layer w0.2: U3_MCP1.4@28.19,74.1 28.19,71.907 28.897,71.2 v1(42.8,71.2) ; R74_4.2@95,40.275 95.275,40.275 96.5,41.5 v1(96.5,42)
NetR74_5_2: R74_5.2 U3_MCP1.5 | length 125.5
  Top Layer w0.2: v1(45.5,70.6) 50.2,65.9 120.8,65.9 121.5,65.2 v1(121.5,42)
  Bottom Layer w0.2: U3_MCP1.5@26.92,74.1 26.9,74.08 26.9,71.6 27.95,70.55 45.45,70.55 v1(45.5,70.6) ; R74_5.2@120,40.275 120.275,40.275 121.5,41.5 v1(121.5,42)
NetR74_6_2: R74_6.2 U3_MCP1.6 | length 152.5
  Top Layer w0.2: v1(48,70) 51.3,66.7 137.301,66.7 146,66.7 146.5,66.2 v1(146.5,42)
  Bottom Layer w0.2: U3_MCP1.6@25.65,74.1 25.7,74.05 25.7,71.3 27.05,69.95 47.95,69.95 v1(48,70) ; R74_6.2@145,40.275 145.275,40.275 146.5,41.5 v1(146.5,42)
NetR74_7_2: R74_7.2 U3_MCP1.7 | length 179.4
  Top Layer w0.2: v1(50.8,69.3) 50.8,69.2 52.5,67.5 136.97,67.5 146.831,67.5 ; 146.9,67.5 171.1,67.5 171.5,67.1 v1(171.5,42)
  Bottom Layer w0.2: U3_MCP1.7@24.38,74.1 24.4,74.08 24.4,71.15 26.25,69.3 v1(50.8,69.3) ; R74_7.2@170,40.175 170.175,40.175 171.5,41.5 v1(171.5,42)
NetR74_8_2: R74_8.2 U3_MCP1.8 | length 205.5
  Top Layer w0.2: v1(53.6,68.6) 53.9,68.3 64.523,68.3 136.638,68.3 194.969,68.3 196.5,66.769 v1(196.5,42)
  Bottom Layer w0.2: U3_MCP1.8@23.11,74.1 23.11,71.033 25.493,68.65 53.55,68.65 v1(53.6,68.6) ; R74_8.2@195,40.275 195.275,40.275 196.5,41.5 v1(196.5,42)
NetR101_2: R101.2 U2.5 | length 12.4
  Bottom Layer w0.2: U2.5@186.1,78.5 187,78.5 187.4,78.9 187.4,83.7 188.775,85.075 R101.2@192.5,85.075 ; R101.2@192,85.4 R101.2@192.5,85.4
NetR501_1_2: R501_1.2 S1_1.2 | length 4.3
  Bottom Layer w0.2: R501_1.2@45.725,25 S1_1.2@50,25
NetR501_2_2: R501_2.2 S1_2.2 | length 4.5
  Bottom Layer w0.2: R501_2.2@109.8,19.375 R501_2.2@109.925,19.5 ; R501_2.2@110.725,20 S1_2.2@115,20
NetR502_1_2: R502_1.2 S2_1.2 | length 4.3
  Bottom Layer w0.2: R502_1.2@60.725,25 S2_1.2@65,25
NetR502_2_2: R502_2.2 S2_2.2 | length 4.3
  Bottom Layer w0.2: R502_2.2@125.725,20 S2_2.2@130,20
NetR503_1_2: R503_1.2 S3_1.2 | length 4.3
  Bottom Layer w0.2: R503_1.2@75.725,25 S3_1.2@80,25
NetR503_2_2: R503_2.2 S3_2.2 | length 4.4
  Bottom Layer w0.2: R503_2.2@140.725,20 S3_2.2@145.1,20
NetR504_1_2: R504_1.2 S4_1.2 | length 4.3
  Bottom Layer w0.2: R504_1.2@90.725,25 S4_1.2@95,25
NetR504_2_2: R504_2.2 S4_2.2 | length 4.3
  Bottom Layer w0.2: R504_2.2@155.725,20 S4_2.2@160,20
NetR505_1_2: R505_1.2 S5_1.2 | length 4.3
  Bottom Layer w0.2: R505_1.2@110.725,25 S5_1.2@115,25
NetR505_2_2: R505_2.2 S5_2.2 | length 4.3
  Bottom Layer w0.2: R505_2.2@15.725,102.5 S5_2.2@20,102.5
NetR506_1_2: R506_1.2 S6_1.2 | length 4.3
  Bottom Layer w0.2: R506_1.2@125.725,25 S6_1.2@130,25
NetR506_2_2: R506_2.2 S6_2.2 | length 4.3
  Bottom Layer w0.2: R506_2.2@30.725,102.5 S6_2.2@35,102.5
NetR507_1_2: R507_1.2 S7_1.2 | length 4.3
  Bottom Layer w0.2: R507_1.2@140.725,25 S7_1.2@145,25
NetR507_2_2: R507_2.2 S7_2.2 | length 4.3
  Bottom Layer w0.2: R507_2.2@45.725,102.5 S7_2.2@50,102.5
NetR508_1_2: R508_1.2 S8_1.2 | length 4.3
  Bottom Layer w0.2: R508_1.2@155.725,25 S8_1.2@160,25
NetR508_2_2: R508_2.2 S8_2.2 | length 4.3
  Bottom Layer w0.2: R508_2.2@60.725,102.5 S8_2.2@65,102.5
NetR509_1_2: R509_1.2 S9_1.2 | length 4.3
  Bottom Layer w0.2: R509_1.2@45.725,20 S9_1.2@50,20
NetR509_2_2: R509_2.2 S9_2.2 | length 4.3
  Bottom Layer w0.2: R509_2.2@15.725,97.5 S9_2.2@20,97.5
NetR510_1_2: R510_1.2 S10_1.2 | length 4.3
  Bottom Layer w0.2: R510_1.2@60.725,20 S10_1.2@65,20
NetR510_2_2: R510_2.2 S10_2.2 | length 4.3
  Bottom Layer w0.2: R510_2.2@30.725,97.5 S10_2.2@35,97.5
NetR511_1_2: R511_1.2 S11_1.2 | length 4.3
  Bottom Layer w0.2: R511_1.2@75.725,20 S11_1.2@80,20
NetR511_2_2: R511_2.2 S11_2.2 | length 4.3
  Bottom Layer w0.2: R511_2.2@45.725,97.5 S11_2.2@50,97.5
NetR512_1_2: R512_1.2 S12_1.2 | length 4.3
  Bottom Layer w0.2: R512_1.2@90.725,20 S12_1.2@95,20
NetR512_2_2: R512_2.2 S12_2.2 | length 4.3
  Bottom Layer w0.2: R512_2.2@60.725,97.5 S12_2.2@65,97.5
NetRP91_1: RP91.1 U6.18 | length 67.1
  Bottom Layer w0.2: U6.18@96.108,71.988 96.108,70.592 96.8,69.9 104.3,69.9 105,70.6 105,72.8 105.5,73.3 124.6,73.3 125.2,72.7 125.2,70.2 125.9,69.5 151.1,69.5 151.65,68.95 RP91.1@151.65,65.05
NetRP91_3: RP91.3 U6.3 | length 26.9
  Bottom Layer w0.2: U6.3@134.208,71.988 135.996,70.2 151.7,70.2 152.8,69.1 RP91.3@152.8,61.95
NetU2_3: U2.3 U2.7 | length 11
  Bottom Layer w0.2: U2.7@186.1,79.5 185.2,79.5 184.7,79 184.7,77.9 185.2,77.4 189.8,77.4 190.3,77.9 190.3,78.6 189.9,79 U2.3@188.9,79
NetU3_MCP2_1: U3_MCP2.1 U6.7 | length 64.7
  Bottom Layer w0.2: U3_MCP2.1@69.6,74.1 U3_MCP2.1@69.8,74.3 ; U3_MCP2.1@69.6,74.5 69.6,70.5 74.3,65.8 120.3,65.8 124.048,69.548 U6.7@124.048,71.988
NetU3_MCP2_2: U3_MCP2.2 U6.8 | length 66.1
  Bottom Layer w0.2: U3_MCP2.2@68.33,74.1 68.33,75.53 68.8,76 70.506,76 71.5,75.006 71.5,69.166 74.466,66.2 118.1,66.2 121.508,69.608 U6.8@121.508,71.988
NetU3_MCP2_3: U3_MCP2.3 U6.9 | length 65
  Bottom Layer w0.2: U3_MCP2.3@67.06,74.1 67.06,75.76 67.7,76.4 70.672,76.4 71.9,75.172 71.9,69.331 74.631,66.6 116,66.6 118.968,69.568 U6.9@118.968,71.988
NetU3_MCP2_4: U3_MCP2.4 U6.10 | length 64
  Bottom Layer w0.2: U3_MCP2.4@65.79,74.1 65.79,76.29 66.3,76.8 70.837,76.8 72.3,75.337 72.3,69.497 74.797,67 113.8,67 116.4,69.6 116.4,71.96 U6.10@116.428,71.988
NetU3_MCP2_5: U3_MCP2.5 U6.11 | length 62.8
  Bottom Layer w0.2: U3_MCP2.5@64.52,74.1 64.52,76.42 65.3,77.2 71.003,77.2 72.7,75.503 72.7,69.663 74.963,67.4 111.7,67.4 113.888,69.588 U6.11@113.888,71.988
NetU3_MCP2_6: U3_MCP2.6 U6.12 | length 62.1
  Bottom Layer w0.2: U3_MCP2.6@63.25,74.1 63.25,77.35 63.5,77.6 71.169,77.6 73.1,75.669 73.1,69.828 75.128,67.8 109.6,67.8 111.348,69.548 U6.12@111.348,71.988
NetU3_MCP2_7: U3_MCP2.7 U6.13 | length 60.7
  Bottom Layer w0.2: U3_MCP2.7@61.98,74.1 61.98,77.18 62.8,78 71.334,78 73.5,75.834 73.5,69.994 75.294,68.2 107.416,68.2 108.808,69.592 U6.13@108.808,71.988
NetU3_MCP2_8: U3_MCP2.8 U6.14 | length 59.9
  Bottom Layer w0.2: U3_MCP2.8@60.71,74.1 60.7,74.11 60.7,77.9 61.2,78.4 71.5,78.4 73.9,76 73.9,70.16 75.46,68.6 105.3,68.6 106.268,69.568 U6.14@106.268,71.988
NetU3_MCP2_19: U3_MCP2.19
NetU3_MCP2_20: U3_MCP2.20
NetU3_MCP2_21: U3_MCP2.21 U6.4 | length 81
  Bottom Layer w0.2: U3_MCP2.21@60.71,83.5 60.71,85.51 61.6,86.4 70.7,86.4 80.7,76.4 130.2,76.4 131.668,74.932 U6.4@131.668,71.988
NetU3_MCP2_22: U3_MCP2.22 U6.5 | length 76.6
  Bottom Layer w0.2: U3_MCP2.22@61.98,83.5 61.98,84.98 63,86 70.534,86 80.534,76 128.1,76 129.128,74.972 U6.5@129.128,71.988
NetU3_MCP2_23: U3_MCP2.23 U6.6 | length 72.1
  Bottom Layer w0.2: U3_MCP2.23@63.3,83.55 63.3,85.2 63.7,85.6 70.369,85.6 80.369,75.6 125.3,75.6 126.588,74.312 U6.6@126.588,71.988
NetU3_MCP2_24: U3_MCP2.24 U6.15 | length 47.5
  Bottom Layer w0.2: U3_MCP2.24@64.5,83.52 64.5,85.1 64.6,85.2 70.203,85.2 80.203,75.2 102.6,75.2 103.6,74.2 103.6,72.116 U6.15@103.728,71.988
NetU3_MCP2_25: U3_MCP2.25 U6.16 | length 42.6
  Bottom Layer w0.2: U3_MCP2.25@65.79,83.5 65.79,84.69 65.9,84.8 66.812,84.8 70.037,84.8 80.037,74.8 100.5,74.8 101.2,74.1 U6.16@101.2,72.576
NetU3_MCP2_26: U3_MCP2.26
NetU3_MCP2_27: U3_MCP2.27
NetU3_MCP2_28: U3_MCP2.28
"PGEC DEBUG": P2.4 U1.15 | length 36.3
  Bottom Layer w0.2: U1.15@178.8,13.39 178.59,13.6 176.8,13.6 175.8,12.6 175.8,2.5 176.8,1.5 195.9,1.5 196.62,2.22 P2.4@196.62,3.4
"PGED DEBUG": P2.5 U1.14 | length 15.9
  Bottom Layer w0.2: U1.14@187.9,13.59 189.61,13.59 199.16,4.04 P2.5@199.16,3.4
SCK: P3.5 U1.25 U3_MCP1.12 U3_MCP2.12 U5.6 | length 359.5
  Top Layer w0.2: v1(51.2,76.9) 51.381,76.9 52.031,76.25 52.569,76.25 53.006,76.687 72.607,76.687 73.194,76.1 191.966,76.1 192.766,76.9 v1(194.2,76.9) 194.9,76.9 203.6,68.2 203.6,39.126 199.175,34.7 182,34.7 181.3,35.4 181.3,36.3 182,37 v1(182,37.3) ; v1(186.7,125) 193.8,125 195,123.8 195,123.531 194.7,123.231 194.7,81.4 194.2,80.9 v1(194.2,80.75)
  Bottom Layer w0.2: U3_MCP1.12@18.03,74.1 18.03,76.43 18.8,77.2 19.1,77.2 50.9,77.2 51.9,76.2 51.9,72.5 52.641,71.759 55.159,71.759 55.63,72.23 U3_MCP2.12@55.63,74.1 ; U1.25@179.5,26.29 178.31,26.29 176,28.6 176,33.5 179.8,37.3 v1(182,37.3) ; U5.6@181.7,68.54 182.94,68.54 185.8,71.4 192.085,71.4 195.35,74.665 195.35,75.632 194.2,76.782 v1(194.2,76.9) ; P3.5@185.7,132.65 185.7,126 v1(186.7,125) ; v1(194.2,80.75) v1(194.2,76.9) ; v1@194.35,76.9 v1(194.2,76.9)
SCL: R32.1 U1.17 U4.26 | length 199.5
  Bottom Layer w0.2: R32.1@11.1,24.375 U4.26@14.285,24.375 ; U4.26@14.1,24.36 15.54,24.36 16.55,23.35 16.55,7.75 22.4,1.9 174.166,1.9 175,2.734 175,15.1 176,16.1 178.63,16.1 U1.17@178.8,15.93
"SD SWITCH": P3.S2 R41.1 U1.12 | length 176.8
  Top Layer w0.2: v1(179.5,126.3) 180.3,127.1 195.9,127.1 196.8,126.2 196.8,124.2 195.5,122.9 195.5,80.269 206.441,69.327 206.441,38.007 200.334,31.9 186.9,31.9 v1@186,31
  Bottom Layer w0.2: v1(179.5,126.3) 175.45,122.25 P3.S2@175.45,115.05 175.45,112.35 176.3,111.5 R41.1@184.575,111.5 ; v1@186,31 185.8,30.8 185.8,17.7 187.37,16.13 U1.12@188.9,16.13
  other v1: 186,30.8
SDA: R31.2 U1.18 U4.27 | length 203.7
  Bottom Layer w0.2: R31.2@9,24.7 9.975,25.675 U4.27@14.055,25.675 ; U4.27@14.1,25.63 15.97,25.63 17,24.6 17,7.966 22.666,2.3 102.615,2.3 174,2.3 174.6,2.9 174.6,16.2 175.8,17.4 178.6,17.4 U1.18@178.8,17.2
"TX MIDI": U1.2 U2.1 | length 89.5
  Top Layer w0.2: v1@184,32 184.7,32.7 200.003,32.7 205.641,38.339 205.641,68.996 194.588,80.05 v1(191.35,80.05)
  Bottom Layer w0.2: v1@184,32 185.2,33.2 189.5,33.2 191.4,31.3 191.4,29.6 190.63,28.83 U1.2@188.9,28.83 ; U2.1@188.9,80 188.95,80.05 v1(191.35,80.05)
  other v1: 183.8,31.8
X1: C105.1 U1.9 Y1.2 | length 15.7
  Bottom Layer w0.2: U1.9@188.9,19.94 195.86,19.94 196.5,20.58 Y1.2@196.5,24.05 ; Y1.2@196.6,22.1 C105.1@200.975,22.1
X2: C106.1 U1.10 Y1.1 | length 15.8
  Bottom Layer w0.2: U1.10@188.9,18.67 195.87,18.67 196.44,18.1 Y1.1@196.44,14.61 ; Y1.1@196.44,16.6 C106.1@200.975,16.6
pads on no net: Cod_1. Cod_2. Cod_3. Cod_4. Cod_5. Cod_6. Cod_7. Cod_8. Cod_9. P2.6 P3.S1 P3.x U2.2 U2.6 U4.2 U4.23 U4.24 U4.25 U6.
copper on no net: | length 204.6
  Top Layer w0.2: 169.4,6.8 169.4,9.3 177.3,17.2 180.9,17.2 172.9,9.2 180.9,9.2 180.9,3.8 177.4,3.8 177.4,6.8 169.4,6.8 ; 182.4,6.3 182.4,9.2 184.75,11.55 186.4,13.2 186.4,17.2 182.4,13.2 182.4,17.2 190.4,17.2 190.4,13.2 188.5,11.3 186.4,9.2 186.4,6.3 190.4,10.3 190.4,7.302 190.4,6.3 182.4,6.3 ; 192,5.5 192.55,5.5 192.675,5.625 192.675,6.85 193.05,6.85 193.525,7.325 193.525,5.625 193.65,5.5 194.2,5.5 194.2,7.5 194.2,8 194.2,8.975 193.85,9.325 193.675,9.5 193.5,9.5 193.5,8.3 192.7,7.5 192.7,9.5 192,9.5 192,5.5 ; 194.6,5.5 195.3,6.2 195.3,7 196.8,5.5 196.8,6.3 196.75,6.35 196.65,6.45 196.192,7.26 195.9,7.26 195.9,7.3 196.8,8.2 196.8,9 196.3,9.5 194.8,9.5 194.6,9.3 194.6,5.5 ; 195.3,8 195.3,9 195.8,9 196.1,8.7 196.1,8.3 195.8,8 195.3,8 ; 197.2,5.8 197.2,6.5 197.2,8.5 197.2,9.5 197.475,9.5 197.638,9.338 197.8,9.5 198.3,9.5 198.5,9.3 199.4,8.4 199.4,8 199.4,6.4 198.5,5.5 197.5,5.5 197.2,5.8 ; 197.9,6.3 197.9,8.3 198.25,8.65 198.8,8.1 198.8,7 198.1,6.3 197.9,6.3 ; 199.8,6.4 200.7,5.5 201.2,6 201.7,5.5 202,5.9 202,8.6 201.65,8.95 201.5,8.8 201.5,7.3 201.243,6.957 200.8,7.4 200.8,6.4 200.35,6.85 200.35,9.2 200.175,9.375 199.8,9 199.8,6.4 ; 202.4,5.5 202.4,9.3 202.6,9.5 204.1,9.5 204.6,9 204.6,8.2 203.7,7.3 203.7,7.26 203.992,7.26 204.45,6.45 204.55,6.35 204.6,6.3 204.6,5.5 203.1,7 203.1,6.2 202.4,5.5 ; 203.1,8 203.6,8 203.9,8.3 203.9,8.7 203.6,9 203.1,9 203.1,8

## Polygon pours and split planes (outlines as drawn)
GND on Bottom Layer "gnd" (solid, remove dead copper, shelved, pour order 8): 0.5,139.5 0.5,0.5 209.5,0.5 209.5,139.5 162,139.5 162,125.5 162.172,125.5 167,123.5 167,85.5 162.172,83.5 162,83.5 162,78.5 80,78.5 80,139.5
5V on Bottom Layer "5V" (hatched 90Degree grid 0.4 track 0.2, remove dead copper, shelved, pour order 21): 77,137 77,113 63.5,113 61.6,114.9 61.6,137
3.3V on Bottom Layer "3.3V" (hatched 90Degree grid 0.4 track 0.2, remove dead copper, shelved, pour order 19): 3,137 3,113 18,113 20,115 20,137
GND on Top Layer "gnd" (solid, remove dead copper, shelved, pour order 10): 0.452,139.569 79.952,139.569 79.952,78.569 161.952,78.569 161.952,83.569 162.123,83.569 166.952,85.569 166.952,123.569 162.001,125.619 161.952,125.669 161.952,139.569 209.452,139.569 209.452,0.569 0.452,0.569

## Other copper
Top Layer:
  text "0x2A002A Proto V0" at 176,134.1 h1.52

## Silkscreen, mask and mechanical layers (free items; w line width, h text height)
Drill Drawing:
  circle w0.025: c215.906,70.375 r0.635
  lines w0.025: 215.271,50.69 216.541,50.69 216.541,51.96 215.271,51.96 215.271,50.69 ; 215.271,55.77 216.541,55.77 215.906,54.5 215.271,55.77 ; 215.271,58.31 216.541,58.31 216.541,59.58 215.271,59.58 215.271,58.31 ; 215.271,62.12 215.906,62.438 216.541,62.12 216.223,62.755 216.541,63.39 215.906,63.073 215.271,63.39 215.588,62.755 215.271,62.12 ; 215.271,66.248 215.588,66.248 215.588,65.93 216.223,65.93 216.223,66.248 216.541,66.248 216.541,66.883 216.223,66.883 216.223,67.2 215.588,67.2 215.588,66.883 215.271,66.883 215.271,66.248 ; 215.271,73.55 215.906,73.868 216.541,73.55 216.223,74.185 216.541,74.82 215.906,74.503 215.271,74.82 215.588,74.185 215.271,73.55 ; 215.271,77.678 215.588,77.678 215.906,77.36 216.223,77.678 216.541,77.678 216.223,77.995 216.541,78.313 216.223,78.313 215.906,78.63 215.588,78.313 215.271,78.313 215.588,77.995 215.271,77.678 ; 215.271,81.805 215.906,81.17 216.541,81.805 215.906,82.44 215.271,81.805 ; 215.271,84.98 215.271,85.298 215.588,85.615 215.271,85.933 215.271,86.25 215.588,86.25 215.906,85.933 216.223,86.25 216.541,86.25 216.541,85.933 216.223,85.615 216.541,85.298 216.541,84.98 216.223,84.98 215.906,85.298 215.588,84.98 215.271,84.98 ; 215.525,50.944 216.287,50.944 216.287,51.706 215.525,51.706 215.525,50.944 ; 215.525,62.374 215.906,62.565 216.287,62.374 216.096,62.755 216.287,63.136 215.906,62.946 215.525,63.136 215.715,62.755 215.525,62.374
  lines w0.381: 213.54,49.547 312.066,49.547 ; 213.54,87.647 312.066,87.647 ; 227.533,45.737 227.533,91.457 ; 245.257,45.737 245.257,91.457 ; 279.435,45.737 279.435,91.457 ; 292.285,45.737 292.285,91.457 ; 213.54,45.737 312.066,45.737 312.066,91.457 213.54,91.457 213.54,45.737
  text "Symbol" at 215.826,88.79 h1.83
  text "Hit Count" at 228.676,88.79 h1.83
  text "Finished Hole Size" at 246.4,88.79 h1.83
  text "Plated" at 280.578,88.79 h1.83
  text "Hole Type" at 293.428,88.79 h1.83
  text "1" at 228.676,84.98 h1.52
  text "1.200mm (47.24mil)" at 246.4,84.98 h1.52
  text "PTH" at 280.578,84.98 h1.52
  text "Round" at 293.428,84.98 h1.52
  text "1" at 228.676,81.17 h1.52
  text "1.600mm (62.99mil)" at 246.4,81.17 h1.52
  text "PTH" at 280.578,81.17 h1.52
  text "Round" at 293.428,81.17 h1.52
  text "2" at 228.676,77.36 h1.52
  text "1.500mm (59.06mil)" at 246.4,77.36 h1.52
  text "PTH" at 280.578,77.36 h1.52
  text "Round" at 293.428,77.36 h1.52
  text "4" at 228.676,73.55 h1.52
  text "2.500mm (98.43mil)" at 246.4,73.55 h1.52
  text "PTH" at 280.578,73.55 h1.52
  text "Round" at 293.428,73.55 h1.52
  text "6" at 228.676,69.74 h1.52
  text "0.900mm (35.43mil)" at 246.4,69.74 h1.52
  text "PTH" at 280.578,69.74 h1.52
  text "Round" at 293.428,69.74 h1.52
  text "18" at 228.676,65.93 h1.52
  text "1.800mm (70.87mil)" at 246.4,65.93 h1.52
  text "PTH" at 280.578,65.93 h1.52
  text "Slot" at 293.428,65.93 h1.52
  text "22" at 228.676,62.12 h1.52
  text "3.000mm (118.11mil)" at 246.4,62.12 h1.52
  text "NPTH" at 280.578,62.12 h1.52
  text "Round" at 293.428,62.12 h1.52
  text "64" at 228.676,58.31 h1.52
  text "0.600mm (23.62mil)" at 246.4,58.31 h1.52
  text "PTH" at 280.578,58.31 h1.52
  text "Round" at 293.428,58.31 h1.52
  text "71" at 228.676,54.5 h1.52
  text "1.000mm (39.37mil)" at 246.4,54.5 h1.52
  text "PTH" at 280.578,54.5 h1.52
  text "Round" at 293.428,54.5 h1.52
  text "293" at 228.676,50.69 h1.52
  text "0.300mm (11.81mil)" at 246.4,50.69 h1.52
  text "PTH" at 280.578,50.69 h1.52
  text "Round" at 293.428,50.69 h1.52
  text "482 Total" at 228.676,46.88 h1.52
board_outline:
  lines w0.5: 0,140 0,140 ; 0,140 0,0 210,0 210,140 161.5,140 161.5,125 166.5,123 166.5,86 161.5,84 161.5,78.9 80.5,78.9 ; 0,140 80.5,140 80.5,78.9 ; 80.5,78.9 80.5,78.9

## Dimensions
166.5,123 to 161.5,125 on dimensions
166.5,86 to 161.5,84 on dimensions
166.5,123 to 161.5,140 on dimensions
166.5,123 to 166.5,86 on dimensions
166.5,123 to 161.5,140 on dimensions
30,61.5 to 0,0 on dimensions
30,61.5 to 0,0 on dimensions
154.5,40 to 210,0 on dimensions
154.5,40 to 210,0 on dimensions
55.5,40 to 0,0 on dimensions
55.5,40 to 0,0 on dimensions
35,14 to 0,0 on dimensions
35,14 to 0,0 on dimensions
210,140 to 207,137 on dimensions
207,137 to 210,140 on dimensions
207,3 to 210,0 on dimensions
207,3 to 210,0 on dimensions
3,3 to 0,0 on dimensions
3,3 to 0,0 on dimensions
5,135 to 0,140 on dimensions
5,135 to 0,140 on dimensions
80.5,140 to 80.5,78.9 on dimensions
161.5,141.4 to 210,140.8 on dimensions
80.5,141.5 to 161.5,141.4 on dimensions
0,141.5 to 80.5,141.5 on dimensions
-2.7,0 to -2.4,140 on dimensions
0,-1.2 to 210,-0.7 on dimensions

## Text inside footprints (layer, text, board x,y; h text height)
C1: Bottom Overlay "+" at 48.8,124.5 h1.52
C4: Bottom Overlay "+" at 50.3,124.1 h1.52 r180
C6: Bottom Overlay "+" at 30.2,124.1 h1.52 r180
C9: Bottom Overlay "+" at 36.3,124.4 h1.52
C107: Bottom Overlay "+" at 168,18.4 h1.52 r270
P1: Bottom Overlay "s" at 202,93.2 h1.52 r270
"P IN": Bottom Overlay "s" at 202,83.2 h1.52 r270